# Altium PCB Planar_HB_1.PcbDoc
Units mm, origin at the board's own origin, x right, y up, seen from the top; angles counter-clockwise.
Board outline 20 x 34.23 mm, 4 copper layers (Layer 1, Layer 2, Layer 3, Layer 4), stack 0.603 mm thick; 6 components, 4 nets, 22 pads, 0 vias.
Unrouted connection lines stored in the file: 2.
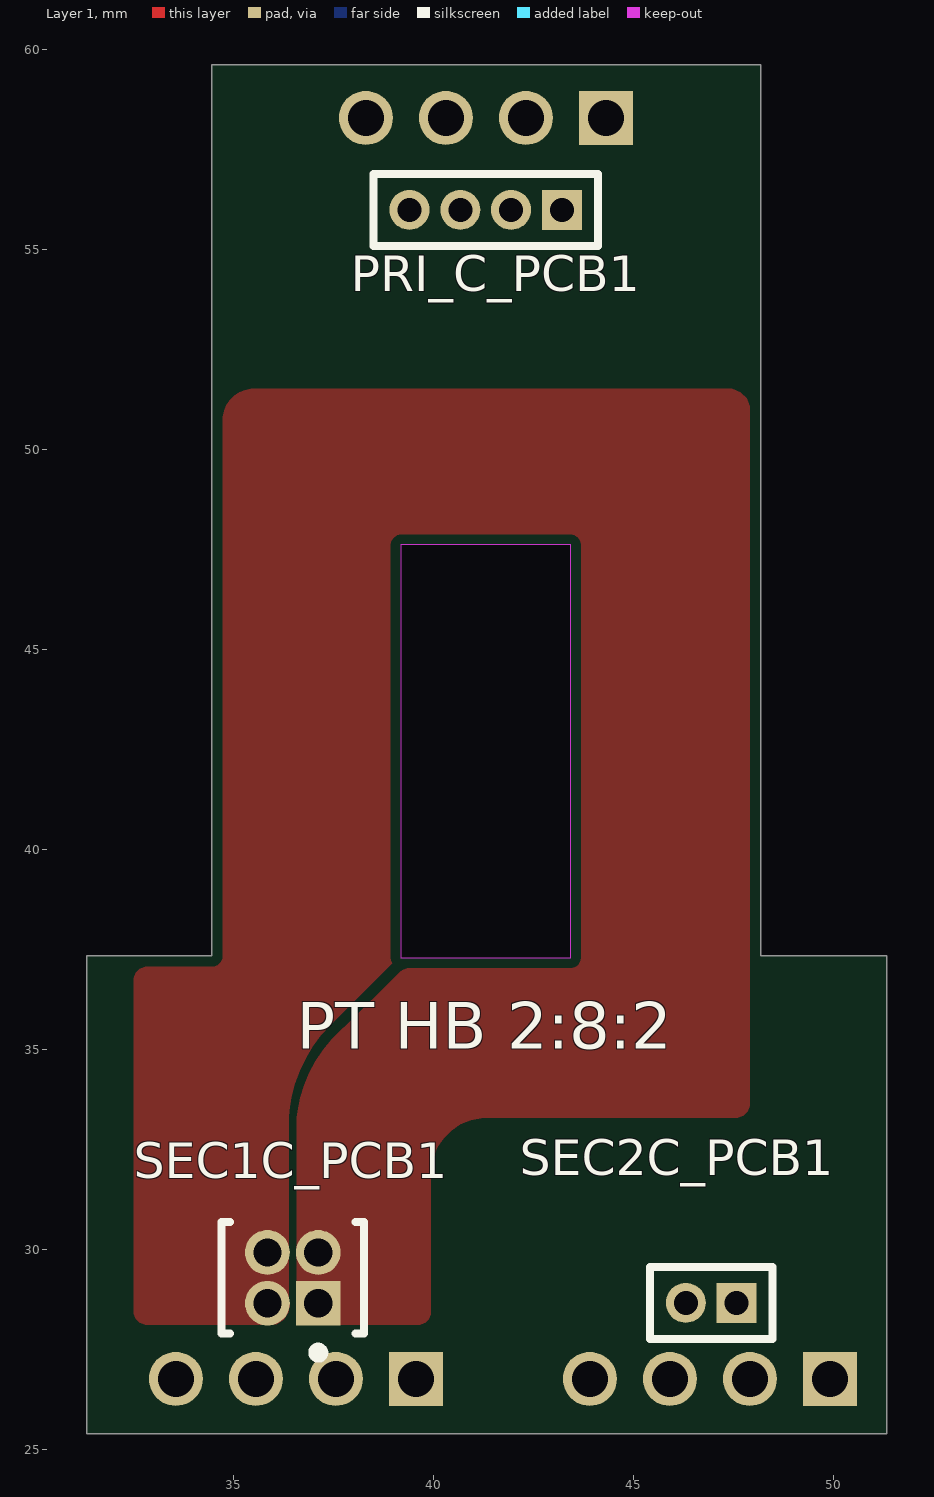
[diagram p0: Layer 1 view]
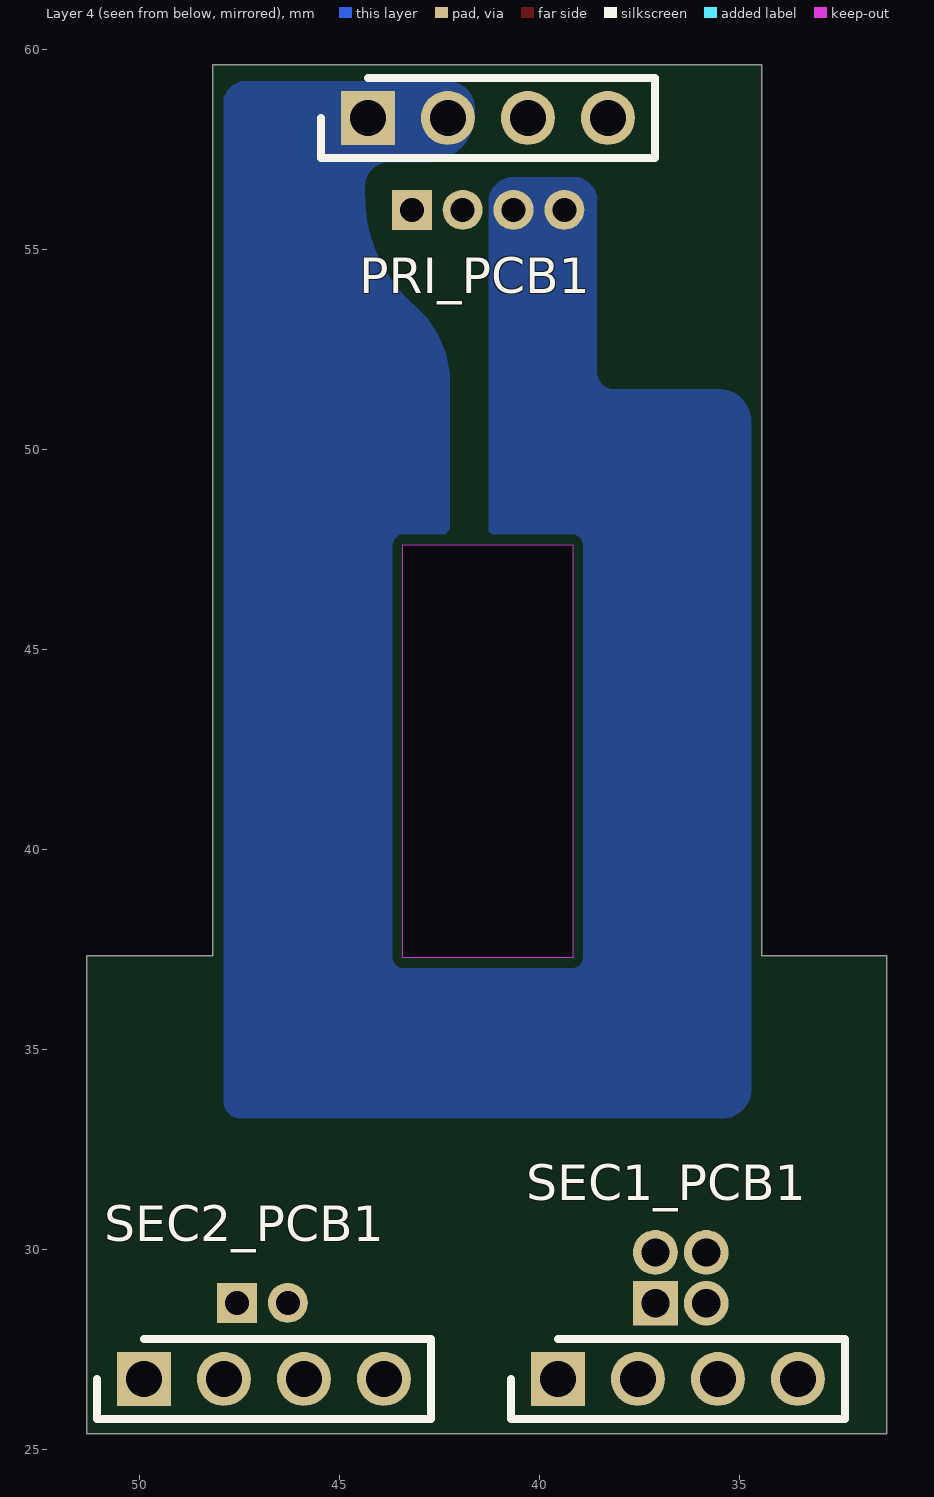
[diagram p1: Layer 4 view, seen from below]
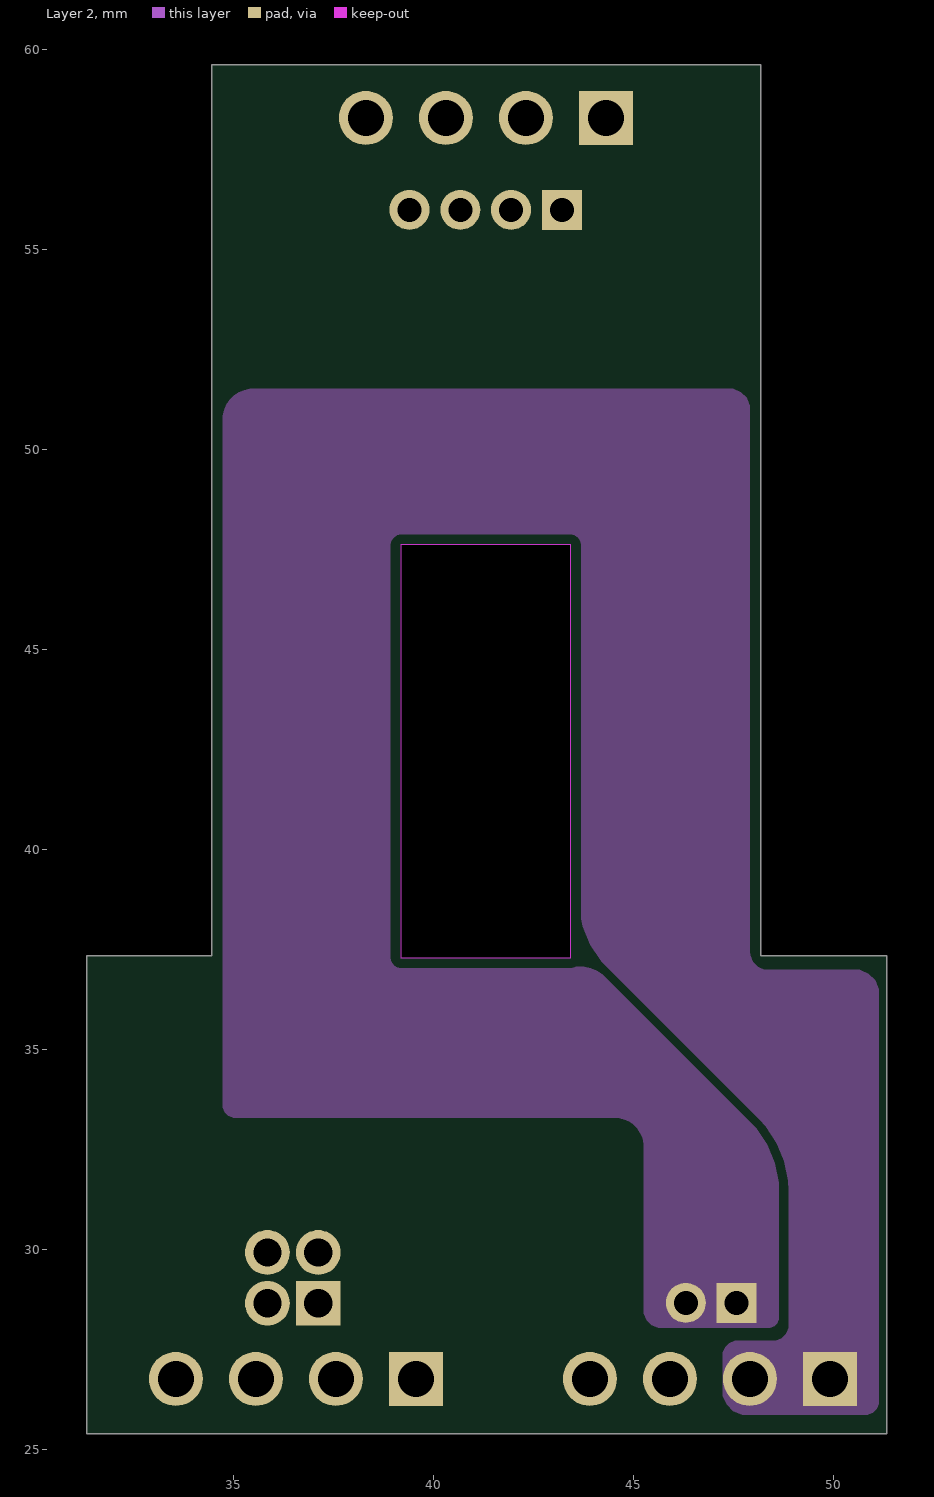
[diagram p2: Layer 2]
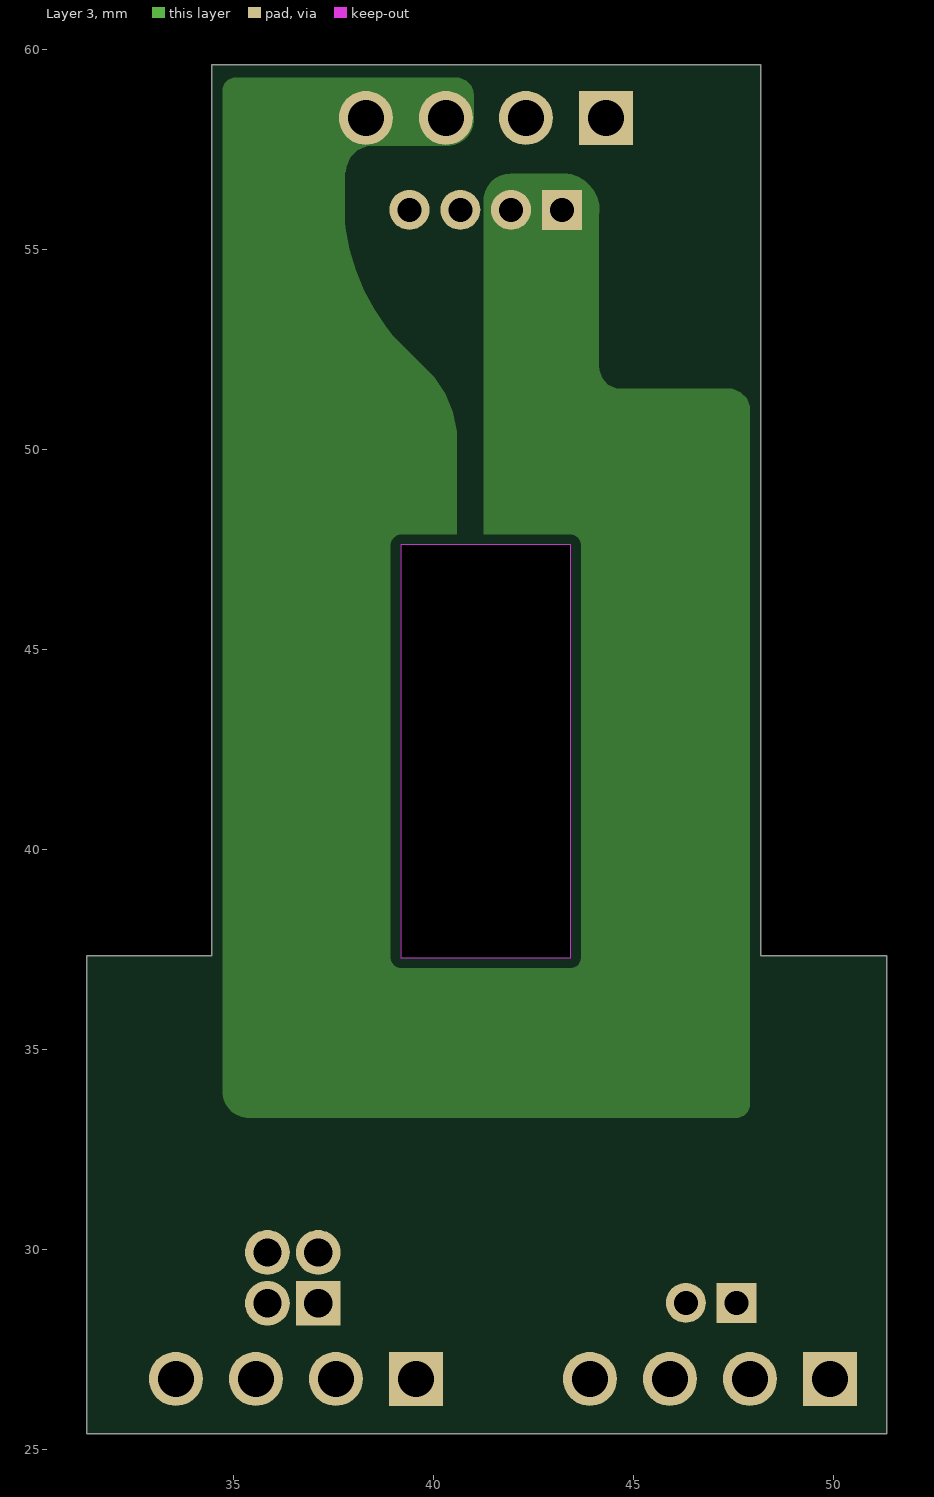
[diagram p3: Layer 3]

## Layer stack, top to bottom
Top Solder: solder mask 0.0102, Solder Resist, Dk 3.5
Layer 1: signal copper 0.0356
Dielectric 2: prepreg 0.0711, PP-006, Dk 4.1
Layer 2: signal copper 0.035
Dielectric 1: dielectric 0.32, FR-4, Dk 4.8
Layer 3: signal copper 0.035
Dielectric 3: prepreg 0.0711, PP-006, Dk 4.1
Layer 4: signal copper 0.0356
Bottom Solder: solder mask 0.0102, Solder Resist, Dk 3.5

## Board outline
31.325,25.4 31.325,37.35 34.45,37.35 34.45,59.625 48.175,59.625 48.175,37.35 51.325,37.35 51.325,25.4
cut-out: 39.175,47.625 39.175,37.3 43.425,37.3 43.425,47.625

## Design rules (kind name [scope] priority, off if disabled: settings)
Clearance [All] p1: gap=0.254 ignorepadtopadclearanceinfootprint=FALSE except(0: Arc-Hole Track-Hole SMDPad-Hole THPad-Hole Via-Hole Fill-Hole Poly-Hole Region-Hole Text-Hole)
PlaneConnect [All] p1: planeconnectstyle=Direct reliefexpansion=0.508 reliefentries=4 reliefconductorwidth=0.254 reliefairgap=0.254
PolygonConnect [All] p1: connectstyle=Direct reliefconductorwidth=0.254 reliefentries=4 polygonreliefangle="90 Angle" airgapwidth=0.254
RoutingVias [All] p1: holewidth=0.711 width=1.27 viastyle="Through Hole" minholewidth=0.711 minwidth=1.27 maxholewidth=0.711 maxwidth=1.27
SolderMaskExpansion [All] p1: expansion=0.102 istentingtop=FALSE
Width [All] p1: maxlimit=10 minlimit=0.254 preferedwidth=0.254
29 further rules are at their usual default settings.

## Components (designator, comment, footprint, x,y, rotation, side; value= is the part's Value field where it differs from the comment)
PRI_C_PCB1 "MHDR1X4" MHDR1X4 43.2,56 r180 top locked
PRI_PCB1 "M22-2510405" HDRV4W50P0X200_1X4_800X200X525P 44.3,58.3 r180 bottom locked
SEC1_PCB1 "M22-2510405" HDRV4W50P0X200_1X4_800X200X525P 39.55,26.775 r180 bottom
SEC1C_PCB1 "FTS-102-01-L-D" FP-FTS-102-01-L-D-MFG 36.475,29.3 r90 top
SEC2_PCB1 "M22-2510405" HDRV4W50P0X200_1X4_800X200X525P 49.9,26.775 r180 bottom locked
SEC2C_PCB1 "MHDR1X2" MHDR1X2 47.57,28.675 r180 top locked

## Footprints (in the part's own frame and the unit in brackets; to place one, negate y for a bottom-side part, rotate by r counter-clockwise, add the part's x,y. Pads: shape width x height; smd on the part's side, far side on the other; paste and mask are expansions set on the pad)
FP-FTS-102-01-L-D-MFG [mm]
  rect 1.12x1.12 hole 0.71 paste-1000 mask+0: 1(-0.635,-0.635)
  round 1.12 hole 0.71 paste-1000 mask+0: 2(-0.635,0.635) 3(0.635,-0.635) 4(0.635,0.635)
  silkscreen extent -1.99,-1.78 1.4,1.78, body extent -1.5,-1.88 1.5,1.88, height 0.25
HDRV4W50P0X200_1X4_800X200X525P [mm]
  rect 1.35x1.35 hole 0.9: 1(0,0)
  round 1.35 hole 0.9: 2(2,0) 3(4,0) 4(6,0)
  silkscreen extent -1.18,-1 7.17,1, body extent -1,-1 7,1, height 5.25
MHDR1X2 [mm] "Connector; Header; 2 Position"
  rect 1x1 hole 0.6: 1(0,0)
  round 1 hole 0.6: 2(1.27,0)
  silkscreen extent -0.9,-0.9 2.17,0.9
MHDR1X4 [mm] "Connector; Header; 4 Position"
  rect 1x1 hole 0.6: 1(0,0)
  round 1 hole 0.6: 2(1.27,0) 3(2.54,0) 4(3.81,0)
  silkscreen extent -0.9,-0.9 4.71,0.9

## Part data
PRI_C_PCB1: "Header, 4-Pin", LatestRevisionDate=17-Jul-2002, LatestRevisionNote="Re-released for DXP Platform.", Publisher="Altium Limited"
PRI_PCB1 SEC1_PCB1 SEC2_PCB1: "Connector", Manufacturer_Name=Harwin, Mouser Part Number=855-M22-2510405, Datasheet Link=https://cdn.harwin.com/pdfs/M22-251.pdf, Height=5.25mm, Manufacturer_Part_Number=M22-2510405, Mouser Price/Stock=https://www.mouser.co.uk/ProductDetail/Harwin/M22-2510405?qs=vF78I%252BjhbY9z7PsFZBZ5CA%3D%3D
SEC1C_PCB1: library part CMP-02766-000107-1, "CONN HEADER VERT 4POS 1.27MM", Color=Black, Max Current Rating=1.75A, Max Operating Temperature=125°C, Min Operating Temperature=-55°C, Package Quantity=1, Connector Type="Male Pin", Contact Material=Bronze, Contact Mating Length=0.12inch, Contact Plating=Gold, Depth=3.42mm, Gender=Male, Housing Color=Black, Housing Material=Polymer, Lead Free="Lead Free", Length=2.54mm, Mount="Through Hole", Number of Contacts=4, Number of Positions=4, Number of Rows=2, Orientation=Straight, Packaging=Bulk, Pitch=1.27mm, Radiation Hardening=No, REACH SVHC="No SVHC", Row Spacing=0.05inch, Termination=Solder
SEC2C_PCB1: "Header, 2-Pin", LatestRevisionDate=17-Jul-2002, LatestRevisionNote="Re-released for DXP Platform.", Publisher="Altium Limited"

## Nets (pads, with @x,y where several pads share a name; then routed paths per layer and width w, separated by ;. In a path a pad name is that pad's centre, name@x,y a point inside that pad or via, vN(x,y) a via of type N, cw(c..) or ccw(c..) an arc to the next point about the centre after c; other vN are vias at no path point)
P_PCB1: PRI_C_PCB1.1 PRI_C_PCB1.2 PRI_C_PCB1.3 PRI_C_PCB1.4 PRI_PCB1.1 PRI_PCB1.2 PRI_PCB1.3 PRI_PCB1.4
S1_1_PCB1: SEC1C_PCB1.1 SEC1C_PCB1.2 SEC1C_PCB1.3 SEC1C_PCB1.4
S2_1_PCB1: SEC2_PCB1.1 SEC2_PCB1.2 SEC2C_PCB1.1 SEC2C_PCB1.2
S2_2_PCB1: SEC2_PCB1.3 SEC2_PCB1.4
pads on no net: SEC1_PCB1.1 SEC1_PCB1.2 SEC1_PCB1.3 SEC1_PCB1.4

## Polygon pours and split planes (outlines as drawn)
S2_1_PCB1 on Layer 2 "NONET_L-01_P-001" (solid, remove dead copper, pour order 12): 47.225,26.475 ccw(c47.825,26.475) 47.825,25.875 50.775,25.875 ccw(c50.775,26.225) 51.125,26.225 51.125,36.4 ccw(c50.525,36.4) 50.525,37 48.35,37 cw(c48.35,37.45) 47.9,37.45 47.9,51 ccw(c47.375,51) 47.375,51.525 35.475,51.525 ccw(c35.475,50.775) 34.725,50.775 34.725,33.625 ccw(c35.05,33.625) 35.05,33.3 44.525,33.3 cw(c44.525,32.575) 45.25,32.575 45.25,28.5 ccw(c45.7,28.5) 45.7,28.05 48.35,28.05 ccw(c48.35,28.325) 48.625,28.325 48.625,31.423 ccw(c46.085,31.423) 47.881,33.219 44.275,36.825 ccw(c43.671,36.221) 43.671,37.075 39.3,37.075 cw(c39.3,37.375) 39,37.375 39,47.575 cw(c39.25,47.575) 39.25,47.825 43.35,47.825 cw(c43.35,47.55) 43.625,47.55 43.625,38.827 ccw(c46.165,38.827) 44.369,37.031 48.131,33.269 cw(c46.335,31.473) 48.875,31.473 48.875,28.125 cw(c48.475,28.125) 48.475,27.725 47.6,27.725 ccw(c47.6,27.35) 47.225,27.35
P_PCB1 on Layer 2 "NONET_L-01_P-001" (solid, remove dead copper, pour order 4): 63.841,102.925 cw(c64.541,102.925) 64.541,103.625 69.566,103.625 cw(c69.566,103.075) 70.116,103.075 70.116,78.125 cw(c69.691,78.125) 69.691,77.7 57.64,77.7 cw(c57.64,78.409) 56.931,78.409 56.931,95.115 cw(c57.741,95.115) 57.741,95.925 63.166,95.925 ccw(c63.166,96.4) 63.641,96.4 63.641,100.625 cw(c64.241,100.625) 64.241,101.225 65.716,101.225 cw(c65.716,100.875) 66.066,100.875 66.066,94.377 cw(c63.526,94.377) 65.322,92.581 64.966,92.225 61.457,92.225 ccw(c61.457,91.975) 61.207,91.975 61.207,81.775 ccw(c61.466,81.775) 61.466,81.516 65.566,81.516 ccw(c65.566,81.775) 65.825,81.775 65.825,92.078 ccw(c60.874,95.062) 66.591,94.205 66.591,101 ccw(c65.991,101) 65.991,101.6 65.041,101.6 cw(c65.041,102.8) 63.841,102.8
S1_1_PCB1 on Layer 1 "NONET_L-01_P-001" (solid, remove dead copper, pour order 10): 38.025,28.125 ccw(c37.912,29.187) 38.975,29.3 38.975,32.3 cw(c39.975,32.3) 39.975,33.3 47.525,33.3 ccw(c47.525,33.675) 47.9,33.675 47.9,50.975 ccw(c47.35,50.975) 47.35,51.525 35.5,51.525 ccw(c35.5,50.75) 34.725,50.75 34.725,37.35 cw(c34.45,37.35) 34.45,37.075 32.85,37.075 ccw(c32.85,36.725) 32.5,36.725 32.5,28.475 ccw(c32.85,28.475) 32.85,28.125 35.975,28.125 ccw(c35.875,28.625) 36.375,28.725 36.375,33.3 cw(c39.899,33.115) 37.537,35.737 38.975,37.175 ccw(c38.915,37.235) 39,37.235 39,47.55 cw(c39.275,47.55) 39.275,47.825 43.35,47.825 cw(c43.35,47.55) 43.625,47.55 43.625,37.4 cw(c43.3,37.4) 43.3,37.075 39.55,37.075 ccw(c39.55,36.412) 39.081,36.881 37.812,35.612 ccw(c39.985,32.963) 36.575,33.3 36.575,28.725 ccw(c37.1,28.65) 37.025,28.125
S1_1_PCB1 on Layer 1 "NONET_L-01_P-001" (solid, remove dead copper, pour order 11): 36.575,29.25 ccw(c37.7,29.25) 37.7,28.125 39.6,28.125 ccw(c39.6,28.45) 39.925,28.45 39.925,31.9 cw(c41.325,31.9) 41.325,33.3 41.325,33.5 ccw(c39.075,33.5) 39.075,35.75
S2_1_PCB1 on Layer 1 "NONET_L-01_P-001" (solid, remove dead copper, pour order 3): 96.766,39.066 ccw(c97.466,39.066) 97.466,38.366 100.016,38.366 ccw(c100.016,38.791) 100.441,38.791 100.441,48.367 ccw(c99.742,48.367) 99.742,49.066 99.166,49.066 cw(c99.066,49.841) 98.291,49.741 98.291,62.791 ccw(c97.379,62.878) 97.466,63.791 85.641,63.791 ccw(c85.678,63.253) 85.141,63.216 85.141,46.339 ccw(c85.844,46.269) 85.775,45.566 94.941,45.566 cw(c94.941,45.216) 95.291,45.216 95.291,41.166 ccw(c95.791,41.166) 95.791,40.666 97.516,40.666 ccw(c97.516,40.841) 97.691,40.841 97.691,44.43 ccw(c95.151,44.43) 96.947,46.226 93.691,49.482 89.691,49.482 cw(c89.691,49.741) 89.432,49.741 89.432,59.741 cw(c89.691,59.741) 89.691,60 93.691,60 cw(c93.691,59.741) 93.95,59.741 93.95,50.959 ccw(c96.49,50.959) 94.694,49.163 97.518,46.339 cw(c96.195,45.016) 98.066,45.016 98.066,40.491 cw(c97.766,40.491) 97.766,40.191 97.566,40.191 ccw(c97.566,39.391) 96.766,39.391
P_PCB1 on Layer 3 "NONET_L-01_P-001" (solid, remove dead copper, pour order 6): 41.25,55.4 41.25,56.3 cw(c41.912,56.237) 41.975,56.9 43.35,56.9 cw(c43.213,55.988) 44.125,55.85 44.125,54.75 44.125,52.1 ccw(c44.675,52.075) 44.651,51.525 47.35,51.525 cw(c47.35,50.975) 47.9,50.975 47.9,33.66 cw(c47.54,33.66) 47.54,33.3 35.375,33.3 cw(c35.375,33.95) 34.725,33.95 34.725,58.975 cw(c35.05,58.975) 35.05,59.3 40.55,59.3 cw(c40.55,58.85) 41,58.85 41,58.275 cw(c40.325,58.275) 40.325,57.6 38.45,57.6 ccw(c38.45,56.95) 37.8,56.95 37.75,56.9 ccw(c43.251,56.354) 38.975,52.85 38.975,37.409 ccw(c39.277,37.409) 39.277,37.107 43.344,37.107 ccw(c43.344,37.382) 43.618,37.382 43.618,47.566 ccw(c43.35,47.566) 43.35,47.834 41.25,47.834 41.25,51.525
P_PCB1 on Layer 3 "NONET_L-01_P-001" (solid, remove dead copper, pour order 7): 37.775,58.775 37.775,55.102 ccw(c40.315,55.102) 38.519,53.306 39.831,51.994 cw(c38.035,50.198) 40.575,50.198 40.575,47.875 39.241,47.875 ccw(c39.241,47.6) 38.966,47.6 38.375,47.6 cw(c38.375,48.5) 37.475,48.5 37.475,55.125 cw(c39.712,56.588) 38.25,58.825
P_PCB1 on Layer 4 "NONET_L-01_P-001" (solid, remove dead copper, pour order 8): 41.627,58.517 cw(c42.327,58.517) 42.327,59.217 47.352,59.217 cw(c47.352,58.668) 47.902,58.667 47.902,33.717 cw(c47.477,33.717) 47.477,33.292 35.426,33.292 cw(c35.426,34.001) 34.717,34.001 34.717,50.708 cw(c35.527,50.708) 35.527,51.517 38.202,51.517 ccw(c38.152,51.942) 38.577,51.992 38.577,56.195 cw(c39.163,56.231) 39.127,56.817 40.652,56.817 cw(c40.652,56.195) 41.275,56.195 41.275,47.97 cw(c40.954,48.222) 41.002,47.817 40.027,47.817 39.243,47.817 ccw(c39.243,47.567) 38.993,47.567 38.993,37.367 ccw(c39.252,37.367) 39.252,37.109 43.352,37.109 ccw(c43.352,37.367) 43.611,37.367 43.611,47.671 ccw(c38.662,50.654) 44.377,49.798 44.377,56.592 ccw(c43.777,56.592) 43.777,57.192 42.827,57.192 cw(c42.827,58.392) 41.627,58.392
P_PCB1 on Layer 4 "NONET_L-01_P-001" (solid, remove dead copper, pour order 9): 44.9,59.054 44.366,56.71 cw(c40.632,56.394) 43.391,53.859 42.996,53.464 ccw(c44.792,51.668) 42.252,51.668 42.252,47.92 cw(c42.107,47.93) 42.202,47.82 43.25,47.82 cw(c43.25,47.31) 43.611,47.671 ccw(c43.854,47.913) 43.854,47.57 45.252,47.57

## Silkscreen, mask and mechanical layers (free items; w line width, h text height)
Top Overlay:
  text "PT HB 2:8:2" at 36.575,34.646 h2
Mechanical 1:
  lines w0.2: 31.325,25.4 51.325,25.4 51.325,37.35 48.175,37.35 48.175,59.625 34.45,59.625 34.45,37.35 31.325,37.35 31.325,25.4 ; 39.24,37.341 43.39,37.341 43.39,47.591 39.24,47.591 39.24,37.341